# Altium PCB IoT_Labview.PcbDoc
Units mil, origin at the board's own origin, x right, y up, seen from the top; angles counter-clockwise.
Board outline 6791.34 x 6200.79 mil, 2 copper layers (Top Layer, Bottom Layer); 13 components, 15 nets, 81 pads, 0 vias.
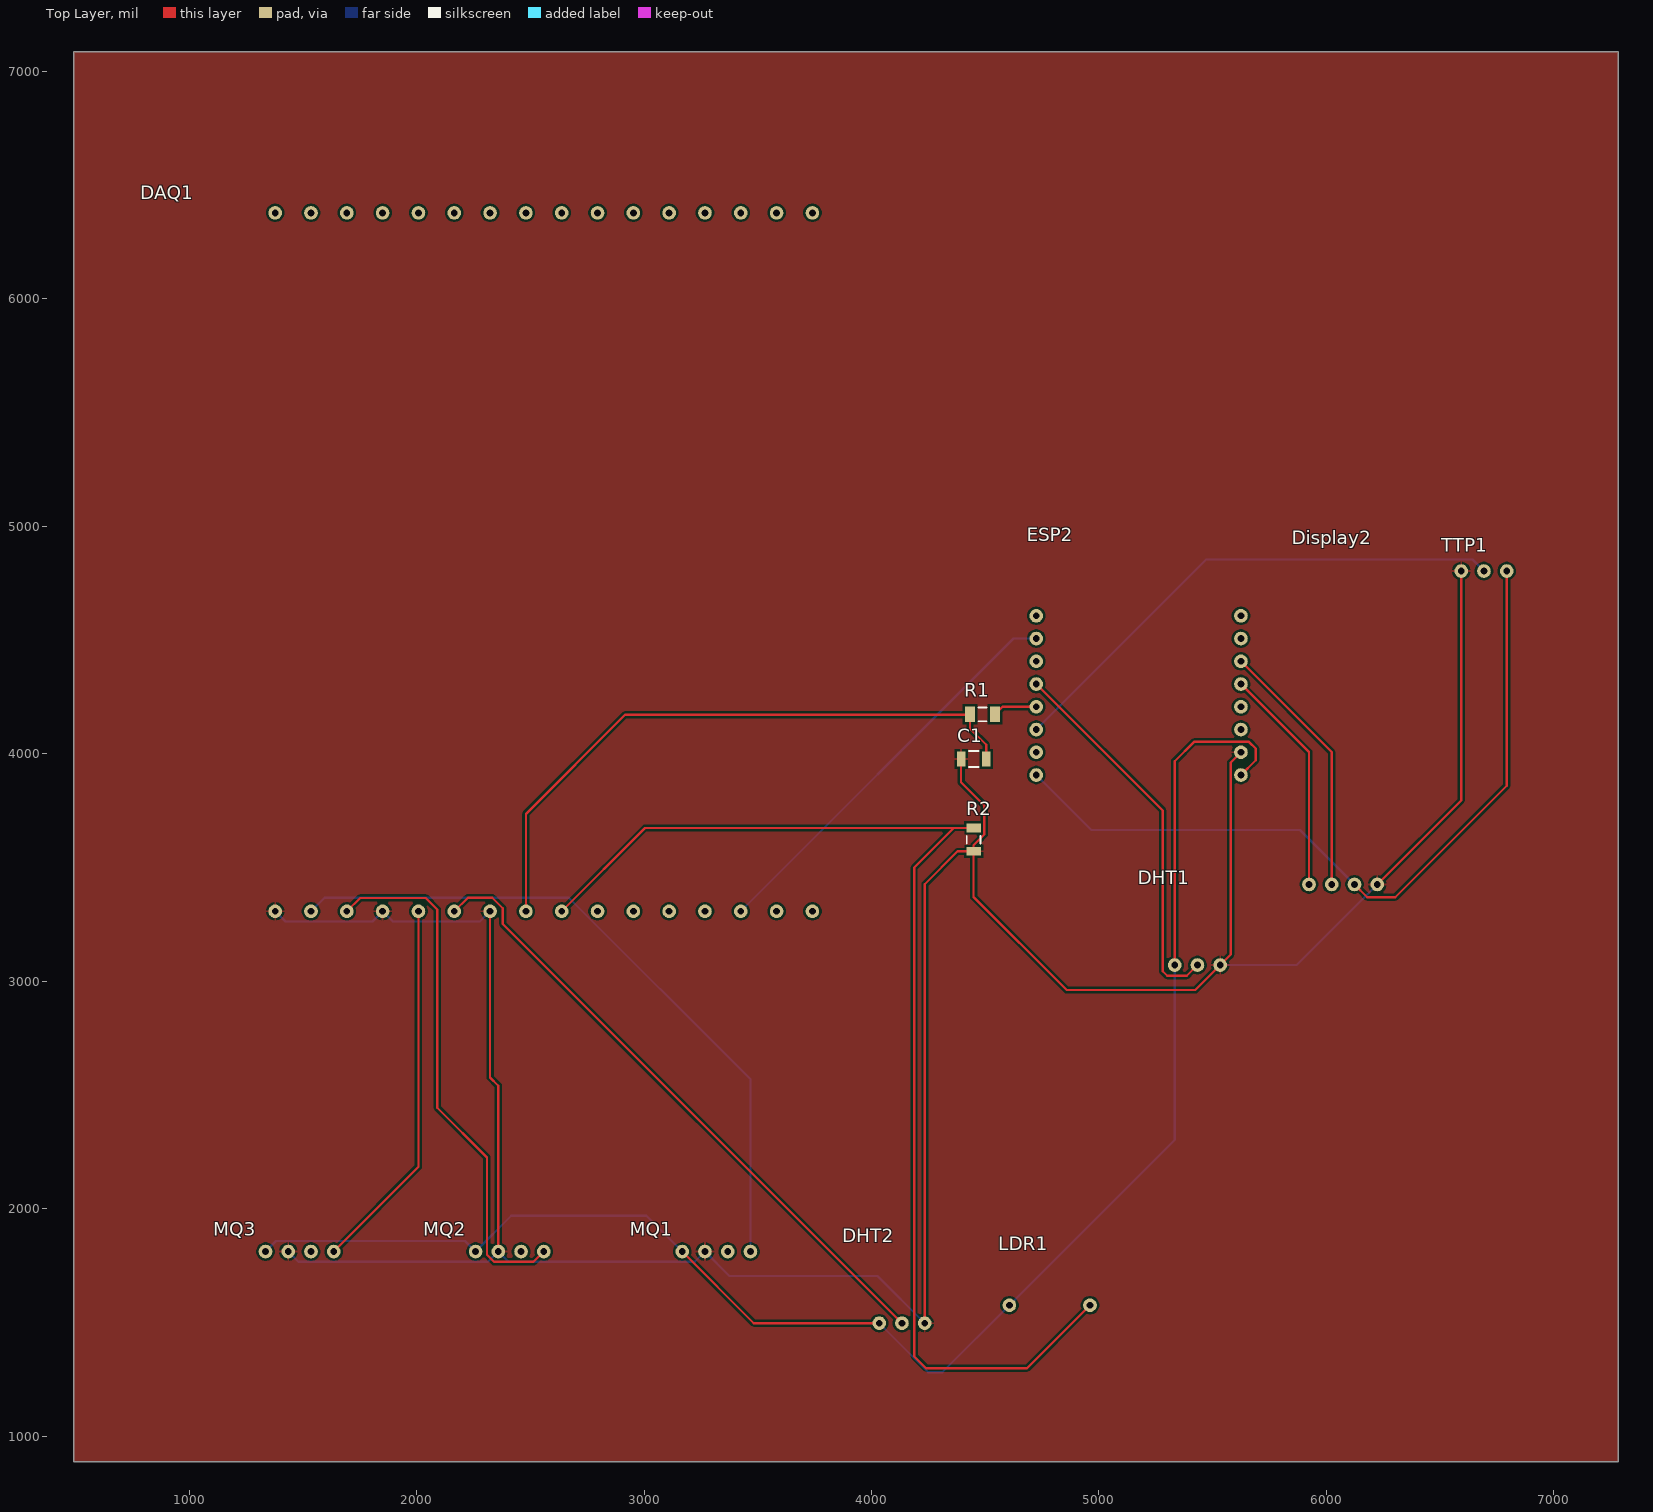
[diagram p0: Top Layer view]
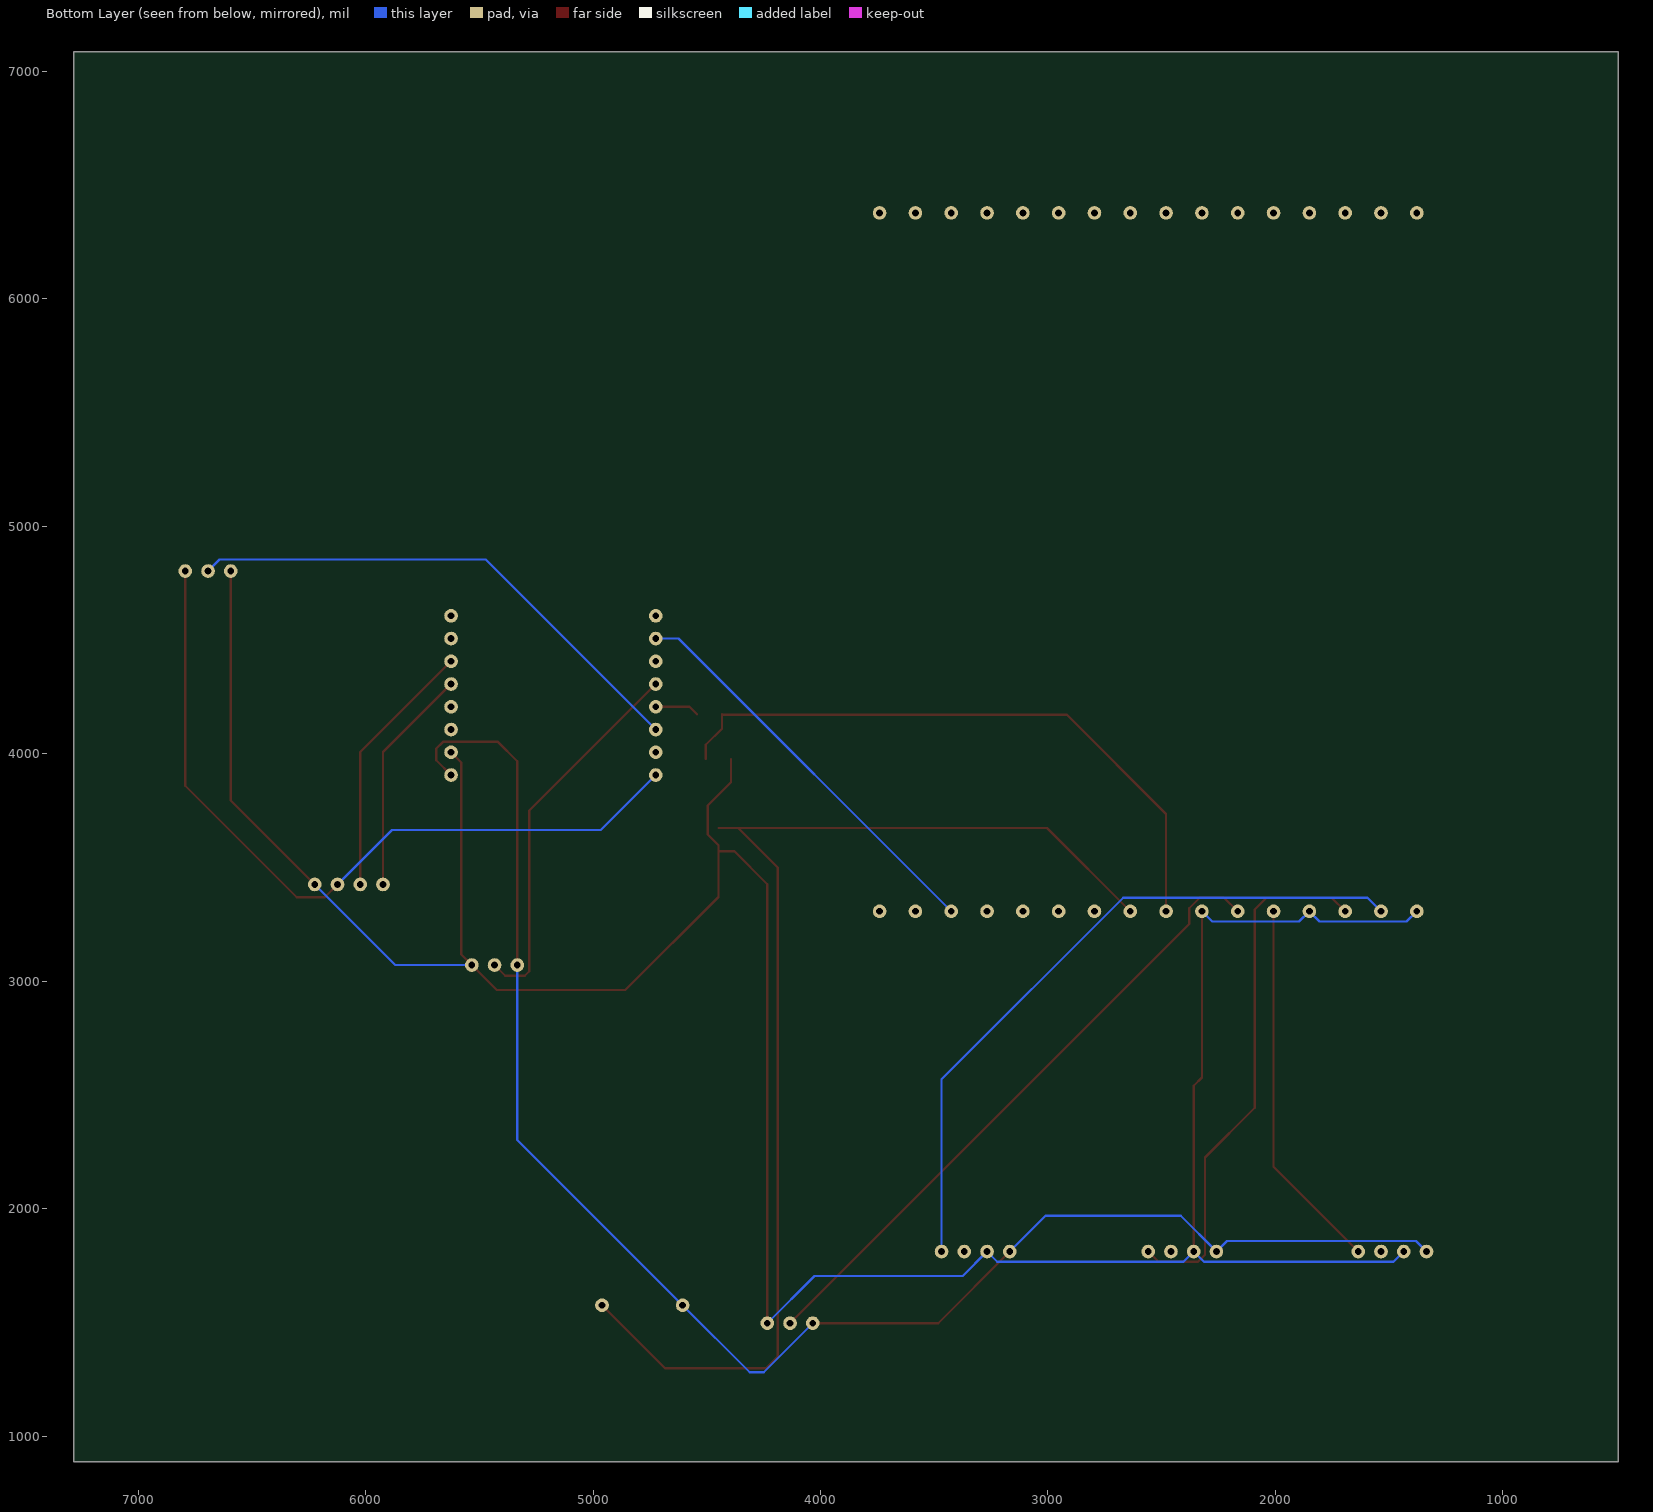
[diagram p1: Bottom Layer view, seen from below]
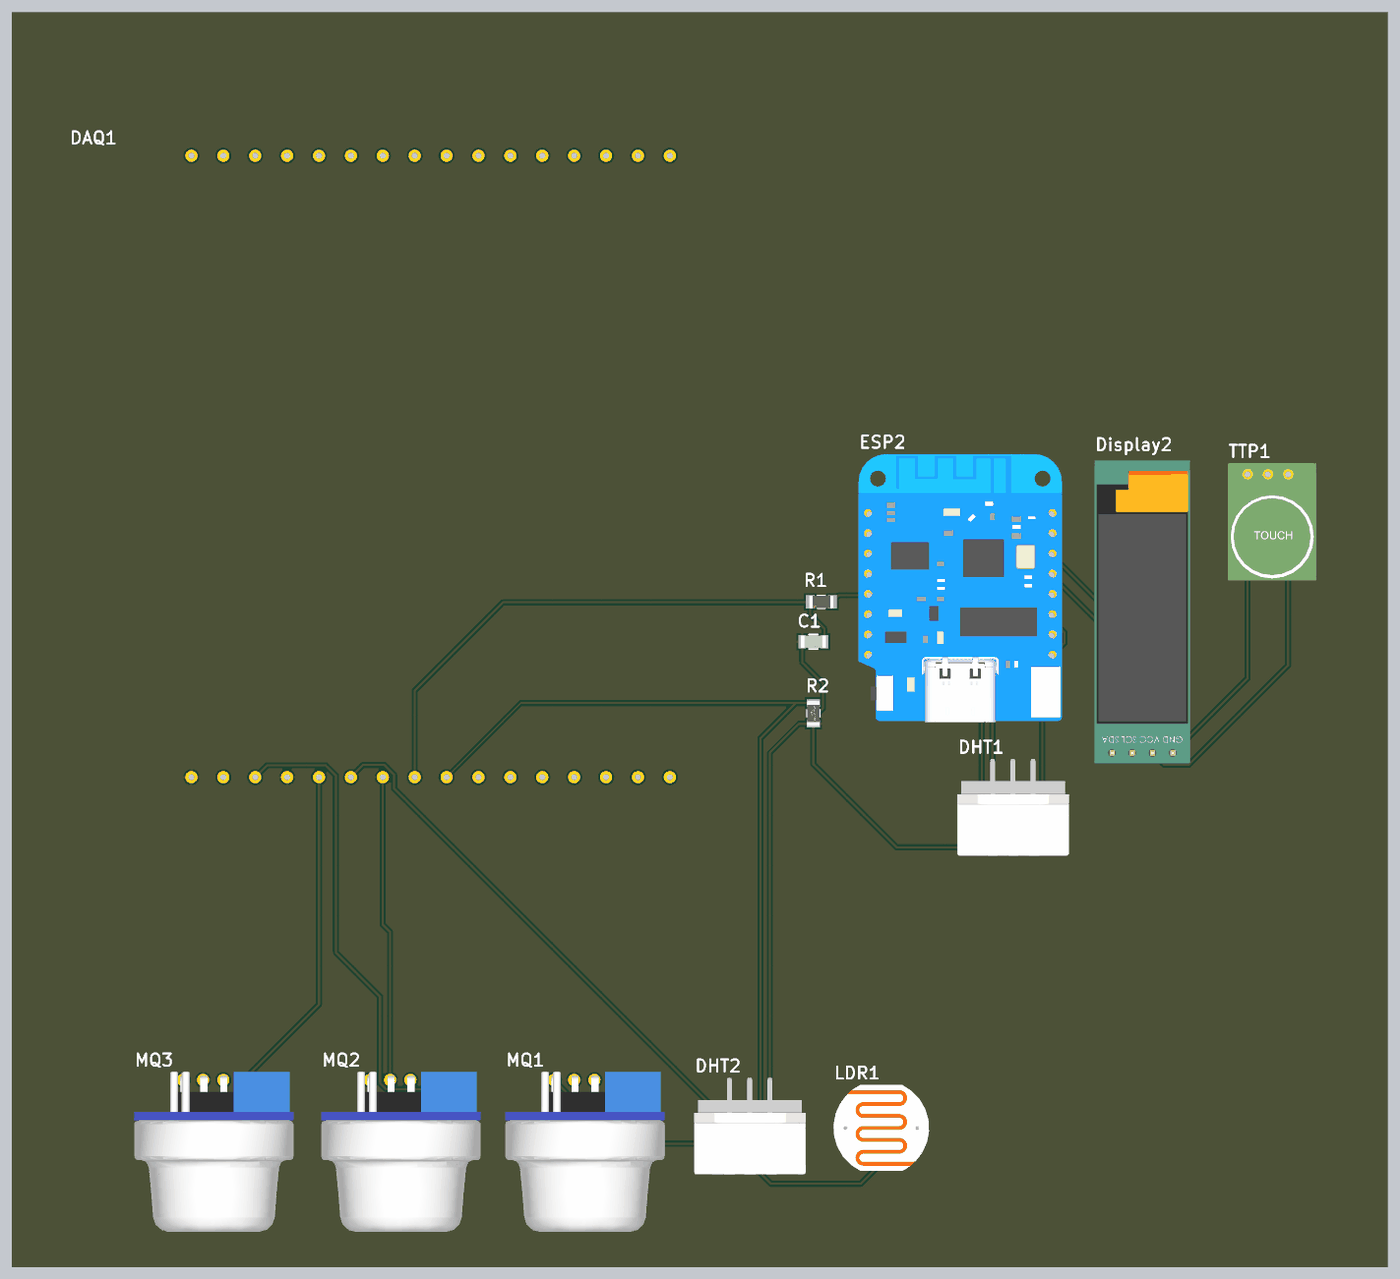
[diagram p2: 3D render of the assembled board from above, using the file's embedded part models]

## Layer stack, top to bottom
Top Solder: solder mask 0.4, Solder Resist, Dk 3.5
Top Layer: signal copper 1.4
Dielectric 1: dielectric 12.6, FR-4, Dk 4.8
Bottom Layer: signal copper 1.4
Bottom Solder: solder mask 0.4, Solder Resist, Dk 3.5

## Board outline
492.13,885.83 7283.46,885.83 7283.46,7086.61 492.13,7086.61

## Design rules (kind name [scope] priority, off if disabled: settings)
Clearance [All] p1: gap=10 ignorepadtopadclearanceinfootprint=TRUE
ComponentClearance [All] p1: gap=10 collisioncheckmode=3 verticalgap=100000 showdistances=FALSE
Height EVR [All] p1: minheight=0 maxheight=99999 prefheight=0
PolygonConnect [All] p1: connectstyle=Relief reliefconductorwidth=10 reliefentries=4 polygonreliefangle="90 Angle" airgapwidth=10
RoutingVias [All] p1: holewidth=28 width=50 viastyle="Through Hole" minholewidth=28 minwidth=50 maxholewidth=28 maxwidth=50
SolderMaskExpansion [All] p1: expansion=0 istentingtop=FALSE
SupplyNets "Schematic Supply Nets" [InNet('GND')] p1: voltage=0.000
Width [All] p1: maxlimit=10 minlimit=10 preferedwidth=10
28 further rules are at their usual default settings.

## Components (designator, comment, footprint, x,y, rotation, side; value= is the part's Value field where it differs from the comment)
C1 "10nF" FP-C1206C-EB-MFG 4448.82,3976.38 r180 top value="10,000 pF"
DAQ1 "NI USB-6009" "NI USB-6009" 2165.35,4724.41 r270 top
DHT1 "DHT11" DHT22 4833.07,2570.87 r0 top
DHT2 "DHT22" DHT22 3533.86,996.06 r0 top
Display2 "128x32 OLED DISPLAY" "128x32 OLED Display" 6423.62,3325.2 r90 top
ESP2 "ESP8266 D1 MINI" "ESP8266 D1 Mini" 4024.41,3106.3 r0 top
LDR1 "LDR" LDR 4484.25,1374.02 r0 top
MQ1 "MQ-2" MQ-135 2663.78,925.98 r0 top
MQ2 "MQ-7" MQ-135 1755.12,925.98 r0 top
MQ3 "MQ-135" MQ-135 831.5,925.98 r0 top
R1 "1206 2k" FP-TFCR1206-IPC_B 4488.19,4173.23 r180 top
R2 "1206 10k" FP-CRGCQ1206-IPC_C 4448.82,3622.05 r90 top value=10KΩ
TTP1 "TTP223" TTP223 6492.91,4203.15 r0 top

## Footprints (in the part's own frame and the unit in brackets; to place one, negate y for a bottom-side part, rotate by r counter-clockwise, add the part's x,y. Pads: shape width x height; smd on the part's side, far side on the other; paste and mask are expansions set on the pad)
"128x32 OLED Display" [mil]
  round 60 hole 30: 1(100,200) 2(100,300) 3(100,400) 4(100,500)
  body extent 51,114 1547,587, height 130
DHT22 [mil]
  round 60 hole 30: 1(500,500) 2(600,500) 3(700,500)
  body extent 327,348 878,826, height 1459
"ESP8266 D1 Mini" [mil]
  round 60 hole 30: 1(700,1500) 2(700,1400) 3(700,1300) 4(700,1200) 5(700,1100) 6(700,1000) 7(700,900) 8(700,800) 9(1600,1500) 10(1600,1400) 11(1600,1300) 12(1600,1200) 13(1600,1100) 14(1600,1000) 15(1600,900) 16(1600,800)
  body extent 648,473 1652,1797, height 200
FP-C1206C-EB-MFG [mm]
  rect 0.95x1.7 smd paste+0 mask+0: 1(-1.4,0) 2(1.4,0)
  silkscreen extent -0.55,-0.9 0.55,0.9, body extent -2,-1 2,1, height 0.25
FP-CRGCQ1206-IPC_C [mil]
  rect 37.64x63.38 smd paste+0 mask+0: 1(-51.22,0) 2(51.22,0)
  silkscreen extent -18,-31 18,31, body extent -74,-37 74,37, height 10
FP-TFCR1206-IPC_B [mil]
  rect 43.53x67.25 smd paste+0 mask+0: 1(-55.17,0) 2(55.17,0)
  silkscreen extent -19,-31 19,31, body extent -87,-43 87,43, height 10
LDR [mil]
  round 60 hole 30: 1(122.05,200.79) 2(476.38,200.79)
  body extent 64,-13 536,413, height 79
MQ-135 [mil]
  round 60 hole 30: 1(503.94,885.04) 2(603.94,885.04) 3(703.94,885.04) 4(803.94,885.04)
  body extent 264,134 1051,925, height 1240
"NI USB-6009" [mil]
  round 60 hole 30: 1(1417.32,-787.4) 2(1417.32,-629.92) 3(1417.32,-472.44) 4(1417.32,-314.96) 5(1417.32,-157.48) 6(1417.32,0) 7(1417.32,157.48) 8(1417.32,314.96) 9(1417.32,472.44) 10(1417.32,629.92) 11(1417.32,787.4) 12(1417.32,944.88) 13(1417.32,1102.36) 14(1417.32,1259.84) 15(1417.32,1417.32) 16(1417.32,1574.8) 17(-1653.54,1574.8) 18(-1653.54,1417.32) 19(-1653.54,1259.84) 20(-1653.54,1102.36) 21(-1653.54,944.88) 22(-1653.54,787.4) 23(-1653.54,629.92) 24(-1653.54,472.44) 25(-1653.54,314.96) 26(-1653.54,157.48) 27(-1653.54,0) 28(-1653.54,-157.48) 29(-1653.54,-314.96) 30(-1653.54,-472.44) 31(-1653.54,-629.92) 32(-1653.54,-787.4)
  body extent -1644,-1391 1407,1958, height 494
TTP223 [mil]
  round 60 hole 30: 1(100,600) 2(200,600) 3(300,600)
  body extent 2,77 439,656, height 20

## Part data
C1: library part CMP-03020-033994-1, "C1206 10,000 pF C0G 5.00% 50 V", Capacitance="10,000 pF", Manufacturer=KEMET, Manufacturer Part Number=C1206C103J5GACAUTO, Package=C1206C-EB, Temperature="-55°C to +150°C", Temperature Characteristic=C0G, Temperature Coefficient=15%, Temperature Range High=+150°C, Temperature Range Low=-55°C, Tolerance=0.05, Voltage Rating="50 V", Automotive=Yes, Automotive Grade="Grade 0", Category=Cap, ComponentLink2Description=Datasheet, ComponentLink2URL=https://content.kemet.com/datasheets/KEM_C1007_X8R_ULTRA_150C_SMD.pdf, Device Class L1="Passive Components", Device Class L2=Capacitors, Device Class L3="Ceramic Capacitors", Height=0.88mm, Ipc Land Pattern Name=CAPC320160X78, Lead Free=Yes, Material=Ceramic, Octopart=https://octopart.com/c1206c103j5gacauto-kemet-88376196, RoHS=TRUE
R1: library part CMP-250906-277321-1, "RES Thin Film, 2kΩ, 0.1%, 0.25W, 25ppm/°C, 1206"
R2: library part CMP-03211-010884-1, "CRGCQ1206 10KΩ 0.25W 1% ±100ppm/°C 200V", Ambient Temperature Range High=+70°C, Manufacturer="TE Connectivity", Manufacturer Part Number=CRGCQ1206F10K, Package=CRGCQ1206, Power Rating=0.25W, Resistance=10KΩ, Temperature="-55°C to +155°C", Temperature Coefficient=±100ppm/°C, Temperature Range High=+155°C, Temperature Range Low=-55°C, Tolerance=0.01, Voltage Rating=200V, Automotive=Yes, Automotive Grade="Grade 913", Category=Res, ComponentLink2Description=Datasheet, ComponentLink2URL=https://www.te.com/commerce/DocumentDelivery/DDEController?Action=showdoc&DocId=Data+Sheet%7F1773204-3%7F1%7Fpdf%7FEnglish%7FENG_DS_1773204-3_1.pdf%7F4-2176347-922, Composition="Thick Film", Device Class L1="Passive Components", Device Class L2=Resistors, Device Class L3="Chip SMD Resistors", Height=0.65mm, Ipc Land Pattern Name=RESC310155X55, Lead Free=Yes, Octopart=https://octopart.com/crgcq1206f10k-te+connectivity-91018244, RoHS=TRUE, Series=CRGCQ

## Nets (pads, with @x,y where several pads share a name; then routed paths per layer and width w, separated by ;. In a path a pad name is that pad's centre, name@x,y a point inside that pad or via, vN(x,y) a via of type N, cw(c..) or ccw(c..) an arc to the next point about the centre after c; other vN are vias at no path point)
3V3: Display2.2 ESP2.8 TTP1.3 | length 3438.2
  Top Layer w10: Display2.2 6179.82,3369 6303,3369 6792.91,3858.91 TTP1.3
  Bottom Layer w10: ESP2.8 4965.71,3665 5883.82,3665 Display2.2
5V: DHT1.1 DHT2.1 ESP2.16 LDR1.1 MQ1.1 MQ2.1 MQ3.1 | length 7020.9
  Top Layer w10: MQ1.1 3482.68,1496.06 DHT2.1 ; DHT1.1 5333.07,3967.07 5418,4052 5660,4052 5689,4023 5689,3970.89 ESP2.16
  Bottom Layer w10: MQ3.1 1381.41,1857 2213.08,1857 MQ2.1 2416.03,1968 3010.74,1968 MQ1.1 ; DHT2.1 4249.92,1280 4311.5,1280 LDR1.1 5333.07,2301.57 DHT1.1
DAT: DHT1.2 ESP2.4 | length 1673.2
  Top Layer w10: ESP2.4 5280,3750.71 5280,3044 5300,3024 5386.2,3024 DHT1.2
GND: C1.2 DAQ1.1 DAQ1.4 DAQ1.7 DHT1.3 DHT2.3 Display2.1 ESP2.15 MQ1.2 MQ2.2 MQ3.2 R2.1 TTP1.1 | length 13048.2
  Top Layer w10: DAQ1.7 2322.83,2576.22 2359.06,2540 MQ2.2 ; DHT2.3 4233.86,3426.51 4378.18,3570.82 R2.1 ; C1.2 4393.7,3875 4496,3772.7 4496,3645 4448.82,3597.82 R2.1 ; ESP2.15 5579,3960.89 5579,3116.8 DHT1.3 5423.2,2961 4858,2961 4448.82,3370.18 R2.1 ; Display2.1 6592.91,3794.49 TTP1.1
  Bottom Layer w10: DAQ1.1 1423.04,3262 1805.31,3262 DAQ1.4 1895.48,3262 2277.75,3262 DAQ1.7 ; MQ3.2 1480.46,1766 2314.03,1766 MQ2.2 2404.08,1766 3222.69,1766 MQ1.2 3374.74,1704 4025.92,1704 DHT2.3 ; DHT1.3 5869.29,3070.87 Display2.1
LDR1: DAQ1.9 LDR1.2 R2.2 | length 5266.9
  Top Layer w10: DAQ1.9 3003.98,3673.27 4362,3673.27 ; R2.2 4362,3673.27 ; LDR1.2 4683.83,1298 4240,1298 4188,1350 4188,3499.27 4362,3673.27
MQ1: DAQ1.2 MQ1.4 | length 3045.2
  Bottom Layer w10: DAQ1.2 1595.35,3367 2669,3367 3467.72,2568.28 MQ1.4
MQ2: DAQ1.3 MQ2.4 | length 2333.5
  Top Layer w10: DAQ1.3 1751.83,3366 2040,3366 2091,3315 2091,2443 2309,2225 2309,1797 2340,1766 2514.03,1766 MQ2.4
MQ3: DAQ1.5 MQ3.4 | length 1650.3
  Top Layer w10: MQ3.4 2007.87,2183.46 DAQ1.5
NetC1_1: C1.1 DAQ1.8 R1.2 | length 2787.6
  Top Layer w10: DAQ1.8 2480.32,3735.32 2916,4171 R1.2@4433.02,4171 ; R1.2 R1.2@4433.02,4171 ; C1.1 4503.94,4039 4433.02,4109.92 R1.2@4433.02,4171
PWM_AO: ESP2.5 R1.1 | length 194.8
  Top Layer w10: R1.1 4576.43,4206.3 ESP2.5
SCK: Display2.3 ESP2.11 | length 1146.5
  Top Layer w10: ESP2.11 6023.62,4007.09 Display2.3
SDA: Display2.4 ESP2.12 | length 1005
  Top Layer w10: ESP2.12 5923.62,4007.09 Display2.4
TCH1: ESP2.6 TTP1.2 | length 2299.3
  Bottom Layer w10: ESP2.6 5472.11,4854 6642.06,4854 TTP1.2
V_Polute: DAQ1.14 ESP2.2 | length 1795.9
  Bottom Layer w10: DAQ1.14 4624.41,4506.3 ESP2.2
V_SENSE: DAQ1.6 DHT2.2 | length 2808.8
  Top Layer w10: DAQ1.6 2225.27,3367 2332,3367 2379,3320 2379,3250.92 DHT2.2
pads on no net: DAQ1.10 DAQ1.11 DAQ1.12 DAQ1.13 DAQ1.15 DAQ1.16 DAQ1.17 DAQ1.18 DAQ1.19 DAQ1.20 DAQ1.21 DAQ1.22 DAQ1.23 DAQ1.24 DAQ1.25 DAQ1.26 DAQ1.27 DAQ1.28 DAQ1.29 DAQ1.30 DAQ1.31 DAQ1.32 ESP2.1 ESP2.3 ESP2.7 ESP2.9 ESP2.10 ESP2.13 ESP2.14 MQ1.3 MQ2.3 MQ3.3

## Polygon pours and split planes (outlines as drawn)
GND on Top Layer "GND_L01_P000" (solid, pour order 0): 492.13,7086.61 7283.46,7086.61 7283.46,885.83 492.13,885.83

## Silkscreen, mask and mechanical layers (free items; w line width, h text height)
Mechanical 1:
  the board outline again, w10